# Altium PCB as5311-module.PcbDoc
Units mm, origin at the board's own origin, x right, y up, seen from the top; angles counter-clockwise.
Board outline 25 x 25 mm, 2 copper layers (Top Layer, Bottom Layer); 16 components, 17 nets, 93 pads, 17 vias.
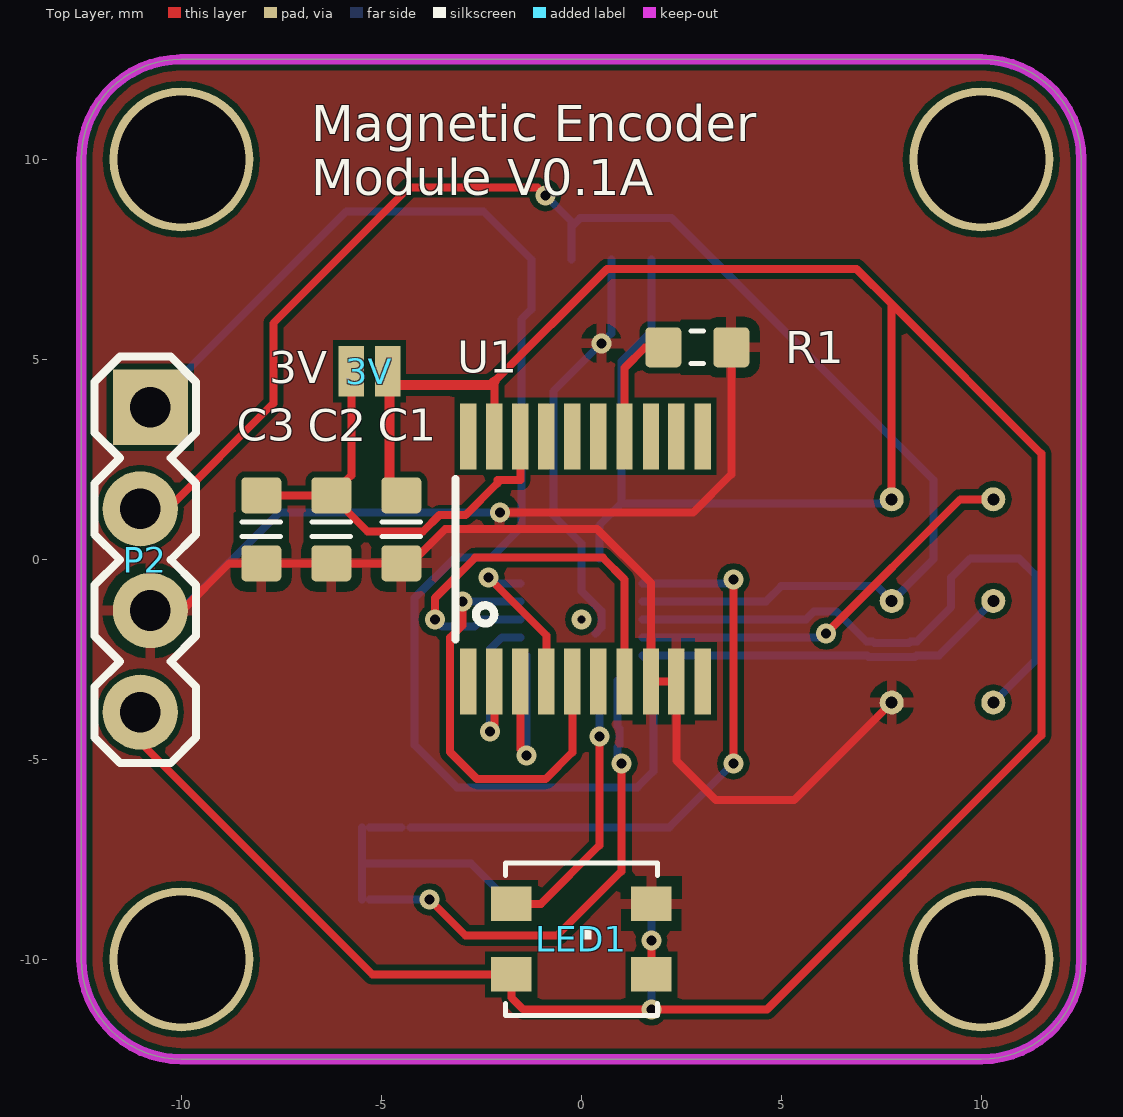
[diagram p0: Top Layer view]
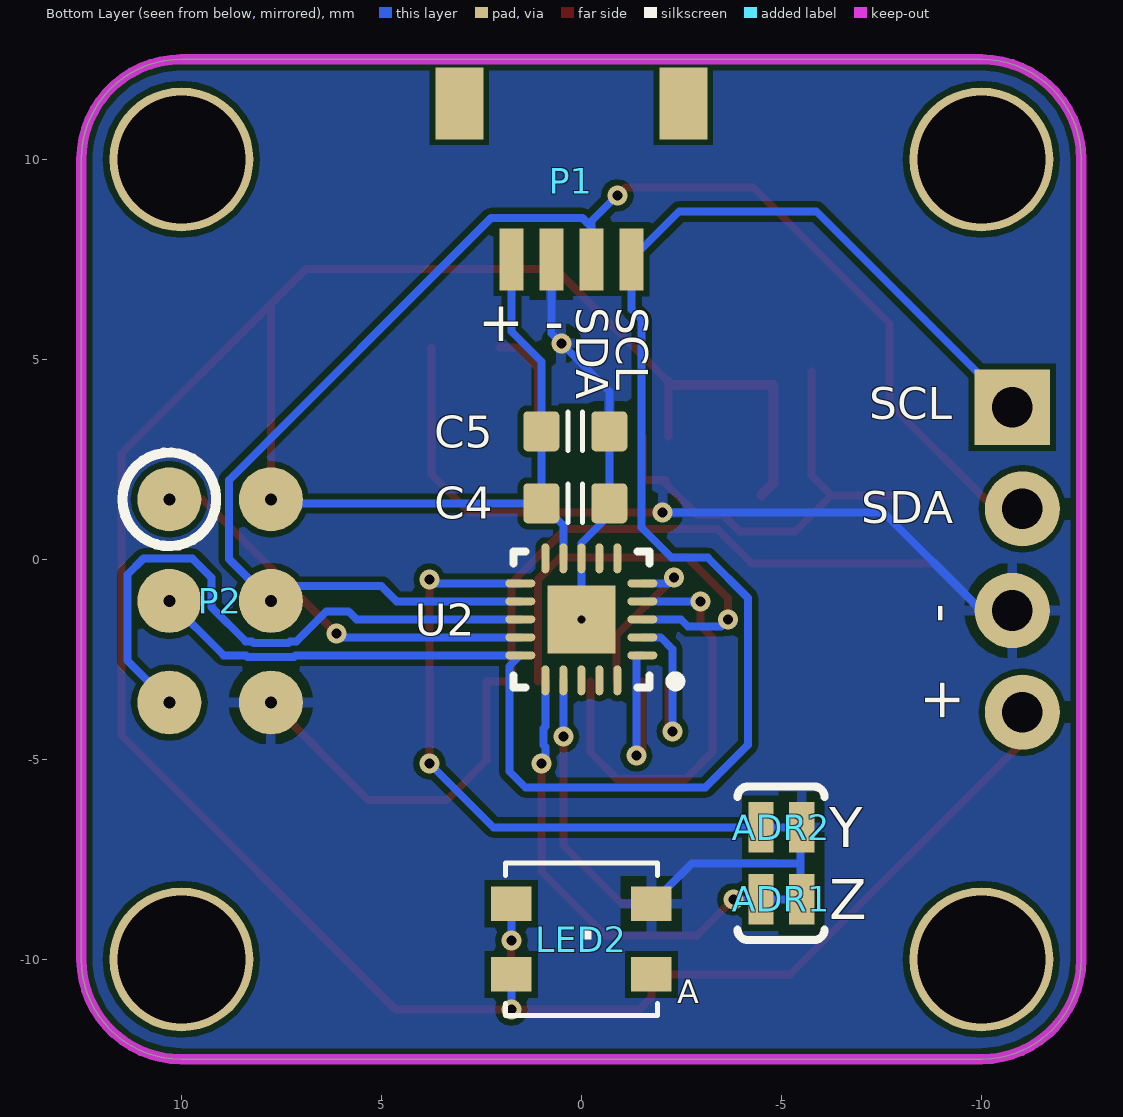
[diagram p1: Bottom Layer view, seen from below]
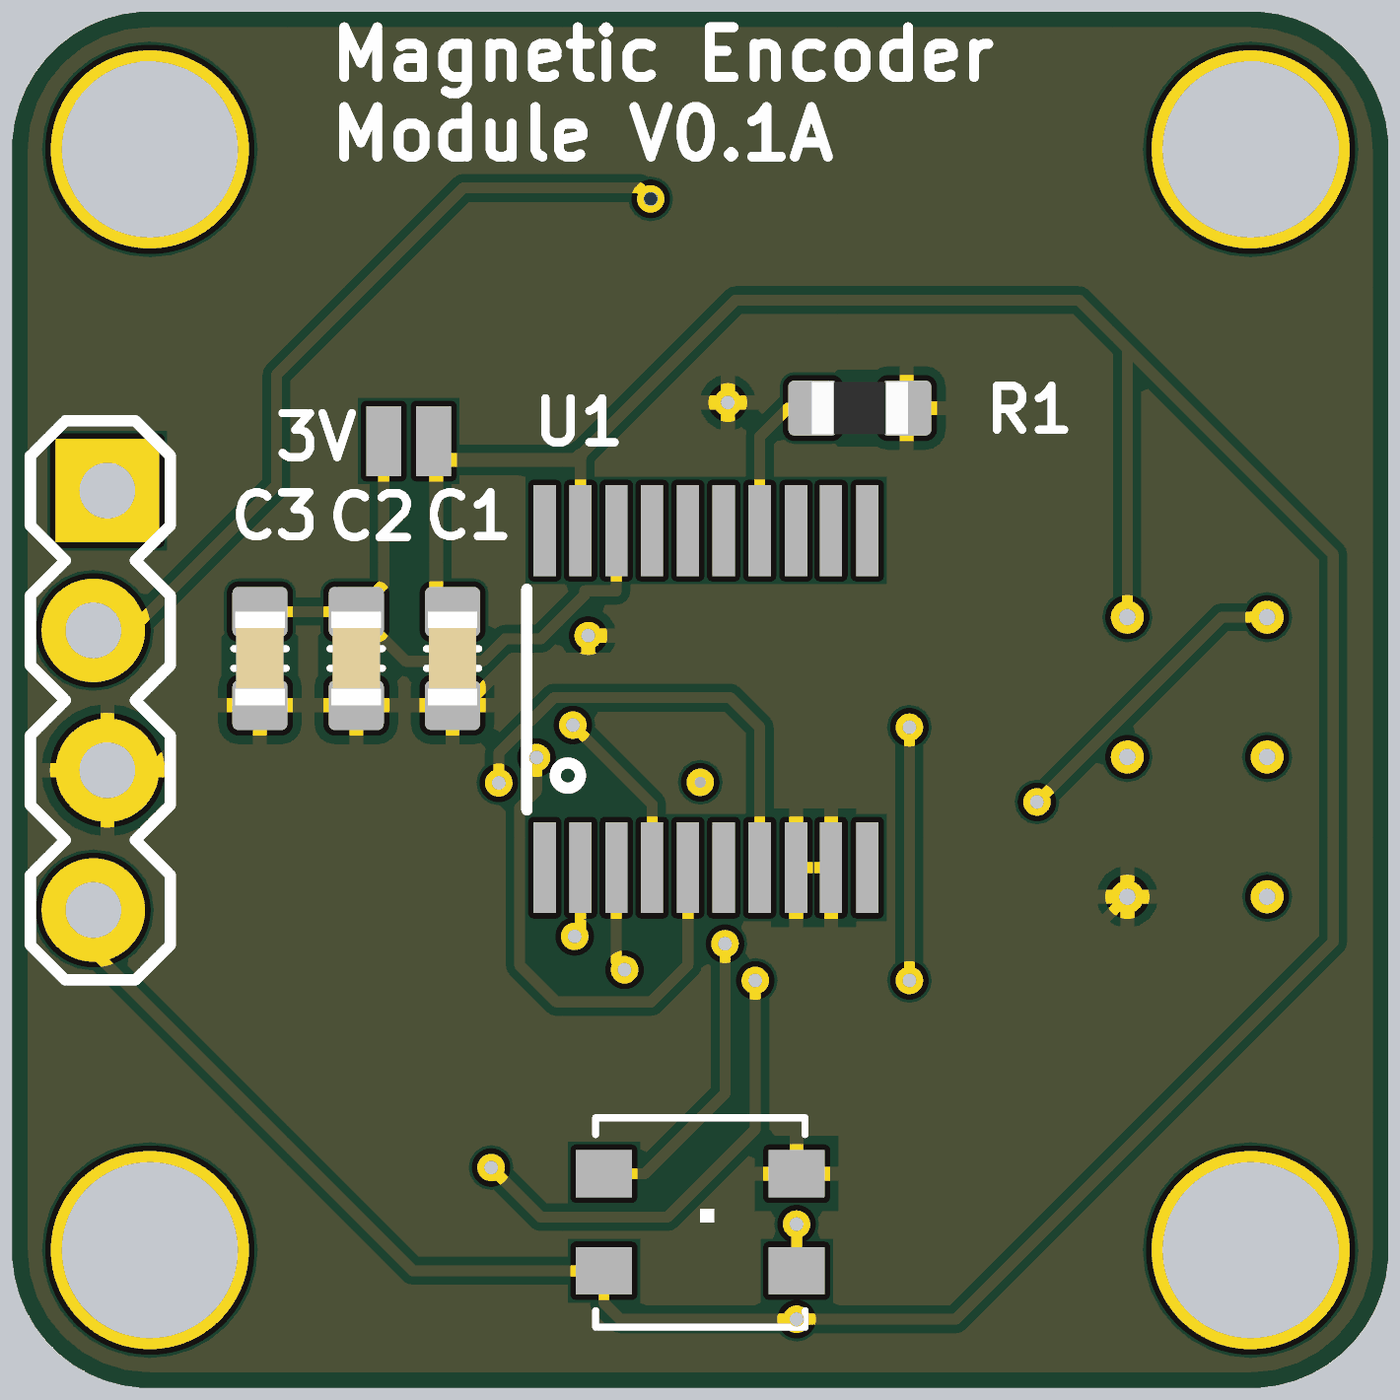
[diagram p2: 3D render of the assembled board from above, using the file's embedded part models]

## Layer stack, top to bottom
Top Solder: solder mask 0.0102, Solder Resist, Dk 3.5
Top Layer: signal copper 0.0356
Dielectric1: dielectric 0.32, FR-4, Dk 4.8
Bottom Layer: signal copper 0.0356
Bottom Solder: solder mask 0.0102, Solder Resist, Dk 3.5

## Board outline
-12.5,-10 -12.5,10 cw(c-10,10) -10,12.5 10,12.5 cw(c10,10) 12.5,10 12.5,-10 cw(c10,-10) 10,-12.5 -10,-12.5 cw(c-10,-10)

## Design rules (kind name [scope] priority, off if disabled: settings)
Clearance [All] p1: gap=0.15
FabricationTestPointUsage TestPointUsage [All] p1: valid=0 allowmultiple=FALSE
FabricationTestpoint Testpoint [All] p1: side=3 testpointundercomponent=TRUE minsize=1.016 maxsize=2.54 preferedsize=1.524 minholesize=0 maxholesize=1.016 preferedholesize=0.813 testpointgrid=0.025 allowsidetop=TRUE allowsidebottom=TRUE usegrid=TRUE gridtolerance=0
HoleSize [All] p1: absolutevalues=TRUE maxlimit=3.5 minlimit=0.025 maxpercent=80.000 minpercent=20.000
PolygonConnect [All] p1: connectstyle=Relief reliefconductorwidth=0.254 reliefentries=4 polygonreliefangle="90 Angle" airgapwidth=0.254
RoutingVias [All] p1: holewidth=0.25 width=0.5 viastyle="Through Hole" minholewidth=0.25 minwidth=0.5 maxholewidth=1 maxwidth=1.4
SilkToSolderMaskClearance SilkscreenOverComponentPads [IsPad] p1: minsilkscreentomaskgap=0.254 clearancetoexposedcopper=TRUE
SolderMaskExpansion [All] p1: expansion=0.102
Width [All] p1: maxlimit=1 minlimit=0.2 preferedwidth=0.2 minimp=50.000000 maximp=50.000000 favimp=50.000000
26 further rules are at their usual default settings.

## Classes and differential pairs
component class as5311-module: 3V ADR1 ADR2 C1 C2 C3 C4 C5 LED1 LED2 P1 P2 R1 U1 U2

## Components (designator, comment, footprint, x,y, rotation, side; value= is the part's Value field where it differs from the comment)
3V "JUMPER-PAD-2-NO" PAD-JUMPER-2-NO_NO_SILK -5.3,4.7 r0 top
ADR1 "JUMPER-PAD-2-NC_BY_TRACE" PAD-JUMPER-2-NC_BY_TRACE_YES_SILK -5,-8.5 r0 bottom
ADR2 "JUMPER-PAD-2-NC_BY_TRACE" PAD-JUMPER-2-NC_BY_TRACE_YES_SILK -5,-6.7 r0 bottom
C1 "approved sub OK" CAPC1608X90N -4.5,0.75 r270 top
C2 "approved sub OK" CAPC1608X90N -6.25,0.75 r270 top
C3 "approved sub OK" CAPC1608X90N -8,0.75 r270 top
C4 "approved sub OK" CAPC1608X90N 0.15,1.4 r180 bottom
C5 "approved sub OK" CAPC1608X90N 0.15,3.2 r180 bottom
LED1 "WS2812B3535" LED3535 0,-9.5 r0 top
LED2 "WS2812B3535" LED3535 0,-9.5 r180 bottom
P1 "JST-SH 4P" SM04B-SRSS-TB 1.75,7.5 r90 bottom
P2 "ICSP" "ICSP Pads - SMD" 10.3,1.5 r180 bottom
P2 "Header 4Standard 4-pin 0.1\" header. Use with straight break away headers (SKU : PRT-00116), right angle break away headers (PRT-00553), swiss pins (PRT-00743), machine pins (PRT-00117), and female headers (PRT-00115). Molex polarized connector foot print use with SKU : PRT-08231 with associated crimp pins and housings. 1MM SMD Version SKU: PRT-10208" 1X04_LOCK -10.9,3.8 r270 top
R1 "Thick Film" RESC1608X55N 2.9,5.3 r0 top
U1 "AS5311" TSSOP-20 0.75,0 r0 top
U2 "ATtiny20-MMH" 20M2_N 0,-1.5 r0 bottom

## Footprints (in the part's own frame and the unit in brackets; to place one, negate y for a bottom-side part, rotate by r counter-clockwise, add the part's x,y. Pads: shape width x height; smd on the part's side, far side on the other; paste and mask are expansions set on the pad)
1X04_LOCK [mil]
  rect 74x74 hole 40: 1(0,5)
  round 74 hole 40: 2(100,-5) 3(200,5) 4(300,-5)
  silkscreen extent -50,-50 350,50
20M2_N [mm] "QFN, 20-Leads, Body 3x3mm, Pitch 0.45mm, Thermal Pad 1.7x1.7mm, IPC Medium Density"
  oval 0.75x0.2 smd: 1(-1.525,0.9) 2(-1.525,0.45) 3(-1.525,0) 4(-1.525,-0.45) 5(-1.525,-0.9) 11(1.525,-0.9) 12(1.525,-0.45) 13(1.525,0) 14(1.525,0.45) 15(1.525,0.9)
  oval 0.2x0.75 smd: 6(-0.9,-1.525) 7(-0.45,-1.525) 8(0,-1.525) 9(0.45,-1.525) 10(0.9,-1.525) 16(0.9,1.525) 17(0.45,1.525) 18(0,1.525) 19(-0.45,1.525) 20(-0.9,1.525)
  rect 1.7x1.7 smd: 21(0,0)
  silkscreen extent -2.47,-1.7 1.7,1.7, body extent -1.55,-1.55 1.55,1.55, height 0.85
CAPC1608X90N [mm] "Chip Capacitor, Body 1.6x0.8mm, EIA 0603, IPC Medium Density"
  round 0.254 on Mech15: 0(0,0)
  rrect25% 0.9x1 smd: 1(-0.85,0) 2(0.85,0)
  Top Layer pour cut-out: -0.6,0.5 -0.4,0.7 0.4,0.7 0.6,0.5 0.6,-0.5 0.4,-0.7 -0.4,-0.7 -0.6,-0.5
  silkscreen extent -0.18,-0.48 0.18,0.48, body extent -0.85,-0.45 0.85,0.45, height 0.89
"ICSP Pads - SMD" [mm]
  round 1.6 / inner round 1.6 / far side round 0.6 hole 0.3: 1(0,0) 2(2.54,0) 3(0,-2.54) 4(2.54,-2.54) 5(0,-5.08) 6(2.54,-5.08)
  silkscreen extent -1.17,-1.17 1.17,1.17
LED3535 [mil]
  rect 40x34 smd: 1(-68.9,35) 2(-68.9,-34.45) 3(69,-34.45) 4(69,35)
  silkscreen extent -75,-75 75,75
PAD-JUMPER-2-NC_BY_TRACE_YES_SILK [mil]
  rect 25x50 smd: 1(-20,0) 2(20,0)
  silkscreen extent -42,30 43,40
PAD-JUMPER-2-NO_NO_SILK [mm]
  rect 0.635x1.27 smd: 1(-0.45,0) 2(0.457,0)
RESC1608X55N [mm] "Chip Resistor, Body 1.6x0.8mm, EIA 0603, IPC Medium Density"
  round 0.254 on Mech15: 0(0,0)
  rrect25% 0.9x1 smd: 1(-0.85,0) 2(0.85,0)
  Top Layer pour cut-out: -0.6,0.5 -0.4,0.7 0.4,0.7 0.6,0.5 0.6,-0.5 0.4,-0.7 -0.4,-0.7 -0.6,-0.5
  silkscreen extent -0.15,-0.41 0.15,0.41, body extent -0.87,-0.47 0.88,0.48, height 0.54
SM04B-SRSS-TB [mm]
  rect 1.55x0.6 smd: 0(0,0) 1(0,-1) 2(0,-2) 3(0,-3)
  rect 1.8x1.2 smd: ""(3.9,-4.3) ""(3.9,1.3)
  body extent -0.55,-4.5 4.4,1.5, height 2.96
TSSOP-20 [mil]
  rect 16x65 smd: 1(-140.75,-120.08) 2(-115.16,-120.08) 3(-89.57,-120.08) 4(-63.98,-120.08) 5(-38.39,-120.08) 6(-12.8,-120.08) 7(13,-120.08) 8(39,-120.08) 9(64,-120.08) 10(90,-120.08) 11(90,121) 12(64,121) 13(39,121) 14(13,121) 15(-12.8,121) 16(-38.39,121) 17(-63.98,121) 18(-89.57,121) 19(-115.16,121) 20(-140.75,121)
  silkscreen extent -154,-79 -115,79

## Part data
C1 C2 C5: library part CAPC_100n_0603_X7R_50V_10%, "Capacitor SMD Cer 100nF 10% 50V X7R 0603"
C3 C4: library part CAPC_1u_0603_X7R_16V_10%, "Capacitor SMD Cer 1uF 10% 16V X7R 0603"
P1: library part SM04B-SRSS-TB
P2: library part "Header 3X2", "Header, 3-Pin, Dual row"
P2: library part M04LOCK
R1: library part RES_1K_0603_5%, "Resistor SMD chip 1k Ohm 0.1W 5% 0603"
U1: "AMS's AS5311 linear hall-effect encoder."
U2: "8-bit AVR Microcontroller, 1.8-5.5V, 12MHz, 2KB Flash, 128 Bytes SRAM, 12 GPIO pins, 20-pin VQFN, Industrial Grade (-40°C to 85°C), Pb-Free"

## Free pads (board coordinates)
  round 3.6 hole 3.2: 0(-10,-10) 0(-10,10) 0(10,-10) 0(10,10)

## Via types
v1: diameter 0.5, hole 0.25, Top Layer to Bottom Layer, 16 vias
v2: diameter 0.5, hole 0.2, Top Layer to Bottom Layer, 1 vias

## Nets (pads, with @x,y where several pads share a name; then routed paths per layer and width w, separated by ;. In a path a pad name is that pad's centre, name@x,y a point inside that pad or via, vN(x,y) a via of type N, cw(c..) or ccw(c..) an arc to the next point about the centre after c; other vN are vias at no path point)
A: U1.4 U2.5 | length 4
  Top Layer w0.2: v1(-2.315,-0.46) -0.875,-1.9 U1.4
  Bottom Layer w0.2: v1(-2.315,-0.46) -2.175,-0.6 U2.5
ADR1: ADR1.2 U2.16 | length 12.2
  Top Layer w0.2: v1(-3.8,-8.5) -2.9,-9.4 -0.6,-9.4 1,-7.8 v1(1,-5.1)
  Bottom Layer w0.2: -5.292,-8.5 ADR1.2 v1(-3.8,-8.5) ; U2.16 0.9,-4.175 0.95,-4.226 0.95,-4.64 0.9,-4.69 0.9,-5.1 v1@0.95,-5.15
ADR2: ADR2.2 U2.11 | length 15.6
  Top Layer w0.2: v1(3.8,-5.1) v1(3.8,-0.5)
  Bottom Layer w0.2: ADR2.2@-4.269,-6.7 -3.9,-6.7 2.2,-6.7 v1(3.8,-5.1) ; U2.11 v1@3.8,-0.6
B: U1.5 U2.4 | length 10.7
  Top Layer w0.2: v1(-2.975,-1.05) -2.975,-1.654 -3.28,-1.959 -3.28,-4.82 -2.61,-5.49 -0.89,-5.49 -0.225,-4.825 U1.5
  Bottom Layer w0.2: v1(-2.975,-1.05) U2.4
GND: ADR1.1 ADR2.1 C1.2 C2.2 C3.2 C4.2 C5.2 LED1.4 LED2.4 P1.1 P2.3@-10.773,-1.28 P2.6 R1.2 U1.8 U1.9 U2.8 U2.21 | length 62.2
  Top Layer w0.2: P2.3@-10.773,-1.28 -9.98,-1.28 -8.8,-0.1 C3.2 C2.2 C1.2 -4.259,-0.1 -3.4,0.759 0.394,0.759 1.741,-0.587 U1.8 U1.9 2.376,-5.032 3.366,-6.023 5.317,-6.023 P2.6 ; v1(-2.036,1.165) 2.791,1.165 3.75,2.124 R1.2
  Bottom Layer w0.2: P2.3@-10.773,-1.28 -10.005,-1.28 -7.56,1.165 v1(-2.036,1.165) ; ADR1.1@-5.481,-8.5 -5.481,-7.6 ; ADR2.1@-5.481,-6.7 -5.481,-7.6 ; ADR2.1@-5.292,-6.7 -4.492,-6.7 ; LED2.4 -2.764,-7.6 -5.481,-7.6 ; U2.21@0.354,-1.854 0.5,-1.707 0.5,-1.293 0,-0.793 U2.8 0,0.4 -0.7,1.1 C4.2 C5.2 -0.7,4.2 0.75,5.65 P1.1
  other v1: 0.5,5.4
I: U1.7 U2.3 | length 10.8
  Top Layer w0.2: v1(-3.661,-1.51) -3.661,-0.968 -2.653,0.04 0.538,0.04 1.08,-0.502 U1.7
  Bottom Layer w0.2: v1(-3.661,-1.51) -3.488,-1.683 -2.671,-1.683 -2.488,-1.5 U2.3
MAGDECN: U1.3 U2.1 | length 4.6
  Top Layer w0.2: U1.3 -1.525,-4.755 v1(-1.375,-4.905)
  Bottom Layer w0.2: U2.1 -1.375,-2.4 v1(-1.375,-4.905)
MAGINCN: U1.2 U2.2 | length 4.2
  Top Layer w0.2: v1(-2.281,-4.299) -2.175,-4.193 U1.2
  Bottom Layer w0.2: v1(-2.281,-4.299) -2.281,-2.247 -1.984,-1.95 U2.2
MISO: P2.1@10.3,1.5 U2.14 | length 10.2
  Top Layer w0.2: v1(6.118,-1.857) 9.476,1.5 P2.1@10.3,1.5
  Bottom Layer w0.2: U2.14 6.026,-1.95 v1(6.118,-1.857)
MOSI: P1.2 P2.2@-11.027,1.26 P2.4@7.76,-1.04 U2.12 | length 39.2
  Top Layer w0.2: P2.2@-11.027,1.26 -10.34,1.26 -7.7,3.9 -7.7,5.9 -4.3,9.3 -1.1,9.3 v1(-0.9,9.1)
  Bottom Layer w0.2: P2.2@-11.027,1.26 P2.2@-10.487,1.8 ; v1(-0.9,9.1) -0.25,8.45 -0.25,8.31 ; P1.2 -0.25,8.31 ; U2.12 4.62,-1.05 4.997,-0.672 7.392,-0.672 7.76,-1.04 8.811,0.011 8.811,1.978 2.257,8.531 -0.029,8.531 -0.25,8.31
Net3V_1: 3V.1 C2.1 C3.1 U1.18 | length 11.8
  Top Layer w0.2: C3.1 C2.1 ; 3V.1 -5.75,2.1 C2.1 ; U1.18 -1.525,1.978 -2.1,1.978 -2.1,1.9 -2.891,1.109 -3.545,1.109 -3.954,0.7 -5.35,0.7 C2.1
NetLED1_3: LED1.3 LED2.1 | length 1.8
  Top Layer w0.2: v1(1.75,-9.528) 1.753,-9.531 LED1.3
  Bottom Layer w0.2: v1(1.75,-9.528) LED2.1
NetR1_1: R1.1 U1.14 | length 2.9
  Top Layer w0.2: U1.14 1.08,4.783 1.597,5.3 R1.1
RST: P2.5 U2.13 | length 15.3
  Bottom Layer w0.2: U2.13 5.618,-1.5 5.818,-1.3 6.374,-1.3 7.124,-2.05 7.285,-2.05 7.325,-2.09 8.195,-2.09 8.235,-2.05 8.389,-2.05 9.242,-1.197 9.242,-0.46 9.725,0.022 10.944,0.022 11.351,-0.384 11.351,-2.529 P2.5
SCK: P1.3 P2.1@-10.773,3.8 P2.3@10.3,-1.04 U2.15 | length 44.9
  Bottom Layer w0.2: P2.1@-10.773,3.8 -5.873,8.7 -2.45,8.7 P1.3 -1.25,6.25 -1.5,6 -1.5,0.8 -2.26,0.04 -3.161,0.04 -4.169,-0.968 -4.169,-4.636 -3.105,-5.7 1.4,-5.7 1.8,-5.3 1.8,-2.675 U2.15 7.14,-2.4 7.18,-2.44 8.34,-2.44 8.38,-2.4 8.94,-2.4 P2.3@10.3,-1.04
VCC: 3V.2 C1.1 C4.1 C5.1 LED1.2 LED2.2 P1.0 P2.2@7.76,1.5 P2.4@-11.027,-3.82 U1.19 U2.9 | length 80.5
  Top Layer w0.2: P2.4@-11.027,-3.82 -11.027,-4.573 -5.225,-10.375 LED1.2 -1.75,-10.956 -1.451,-11.255 v1(1.75,-11.255) 4.645,-11.255 11.5,-4.4 11.5,2.641 7.76,6.381 ; U1.19 -2.175,4.442 0.644,7.261 6.88,7.261 7.76,6.381 ; P2.2@7.76,1.5 7.76,6.381
  Top Layer w0.25: C1.1 -4.8,1.9 -4.8,4.357 -2.26,4.357 -2.175,4.442
  Bottom Layer w0.2: U2.9 0.45,0.85 C4.1 ; v1(1.75,-11.255) LED2.2 ; P1.0 1.75,5.7 1,4.95 C5.1 1,2.283 C4.1 ; P2.2@7.76,1.5 7.66,1.4 C4.1
WS2812B: LED1.1 U2.17 | length 6.9
  Top Layer w0.2: LED1.1 -1.011,-8.611 0.45,-7.15 v1(0.45,-4.433)
  Bottom Layer w0.2: v1(0.45,-4.433) U2.17
pads on no net: C1.0 C2.0 C3.0 C4.0 C5.0 LED2.3 P1. R1.0 U1.1 U1.6 U1.10 U1.11 U1.12 U1.13 U1.15 U1.16 U1.17 U1.20 U2.6 U2.7 U2.10 U2.18 U2.19 U2.20
copper on no net:
  other v2: 0,-1.5

## Polygon pours and split planes (outlines as drawn)
GND on Bottom Layer "Bottom Layer-GND" (solid, pour order 0): 12.5,12.5 12.5,-12.5 -12.5,-12.5 -12.5,12.5
GND on Top Layer "Top VCC" (solid, pour order 2): 12.5,12.5 12.5,-12.5 -12.5,-12.5 -12.5,12.5

## Keep-outs
Keep-Out Layer:
  the board outline again, w0.254

## Silkscreen, mask and mechanical layers (free items; w line width, h text height)
Top Overlay:
  text "Magnetic Encoder / Module V0.1A" at -6.75,9.1 h0.9
  text "3V" at -7.8,4.4 h0.8
Bottom Overlay:
  text "SCL" at -0.875,6.3 h0.8 r90
  text "SDA" at 0.125,6.3 h0.8 r90
  text "-" at 0.425,5.45 h1
  text "+" at 1.425,5.45 h1
  text "SCL" at -7.2,3.5 h0.8
  text "SDA" at -7,0.9 h0.8
  text "-" at -8.6,-1.6 h1 r90
  text "+" at -8.6,-4.1 h1 r90
  text "Y" at -6.2,-7.2 h1
  text "Z" at -6.2,-9 h1
  text "A" at -2.4,-11.3 h1
Bottom Solder:
  rectangle: -5.3,-8.7 -4.8,-8.3
  rectangle: -5.3,-6.9 -4.8,-6.5
Mechanical 16:
  drawing of 1878 lines, arcs and shapes, not listed
  text "1" at -97.285,82.369 h1.78
  text "2" at -24.641,82.369 h1.78
  text "3" at 48.511,82.369 h1.78
  text "4" at 121.409,82.369 h1.78
  text "A" at -131.626,59.357 h1.78
  text "A" at 155.394,59.357 h1.78
  text "B" at -131.626,11.3 h1.78
  text "B" at 155.394,11.3 h1.78
  text "C" at -131.626,-37.214 h1.78
  text "C" at 155.394,-37.214 h1.78
  text "ENGINEER:" at 40.459,-74.222 h1.14
  text "TITLE:" at 78.559,-74.222 h1.14
  text "PCB DESIGNER:" at 40.459,-81.715 h1.14
  text "D" at -131.626,-85.22 h1.78
  text "D" at 155.394,-85.22 h1.78
  text "DATE:" at 40.459,-89.462 h1.14
  text "PART NO.:" at 78.559,-89.462 h1.14
  text "REV:" at 131.899,-89.462 h1.14
  text "Altium Limited" at 7.439,-92.002 h1.78
  text ".PRINT_DATE" at 41.729,-92.51 h1.78
  text "12a Rodborough Rd" at 7.439,-94.542 h1.78
  text "Frenchs Forest" at 7.439,-97.082 h1.78
  text "FILE NAME:" at 40.459,-97.082 h1.14
  text "DWG NO:" at 78.559,-97.082 h1.14
  text "SCALE:" at 131.899,-97.082 h1.14
  text "NSW 2086" at 7.439,-99.622 h1.78
  text ".PCB_FILE_NAME_NO_PATH" at 41.729,-100.13 h1.78
  text "1" at -97.285,-105.591 h1.78
  text "2" at -24.641,-105.591 h1.78
  text "3" at 48.511,-105.591 h1.78
  text "4" at 121.409,-105.591 h1.78

## Dimensions
-10,12.5 to -10,-12.5 on Mechanical 13
-12.5,10 to 12.5,10 on Mechanical 13